# EAGLE board Universal_Board_Side_Mount (EAGLE 9.6.2)
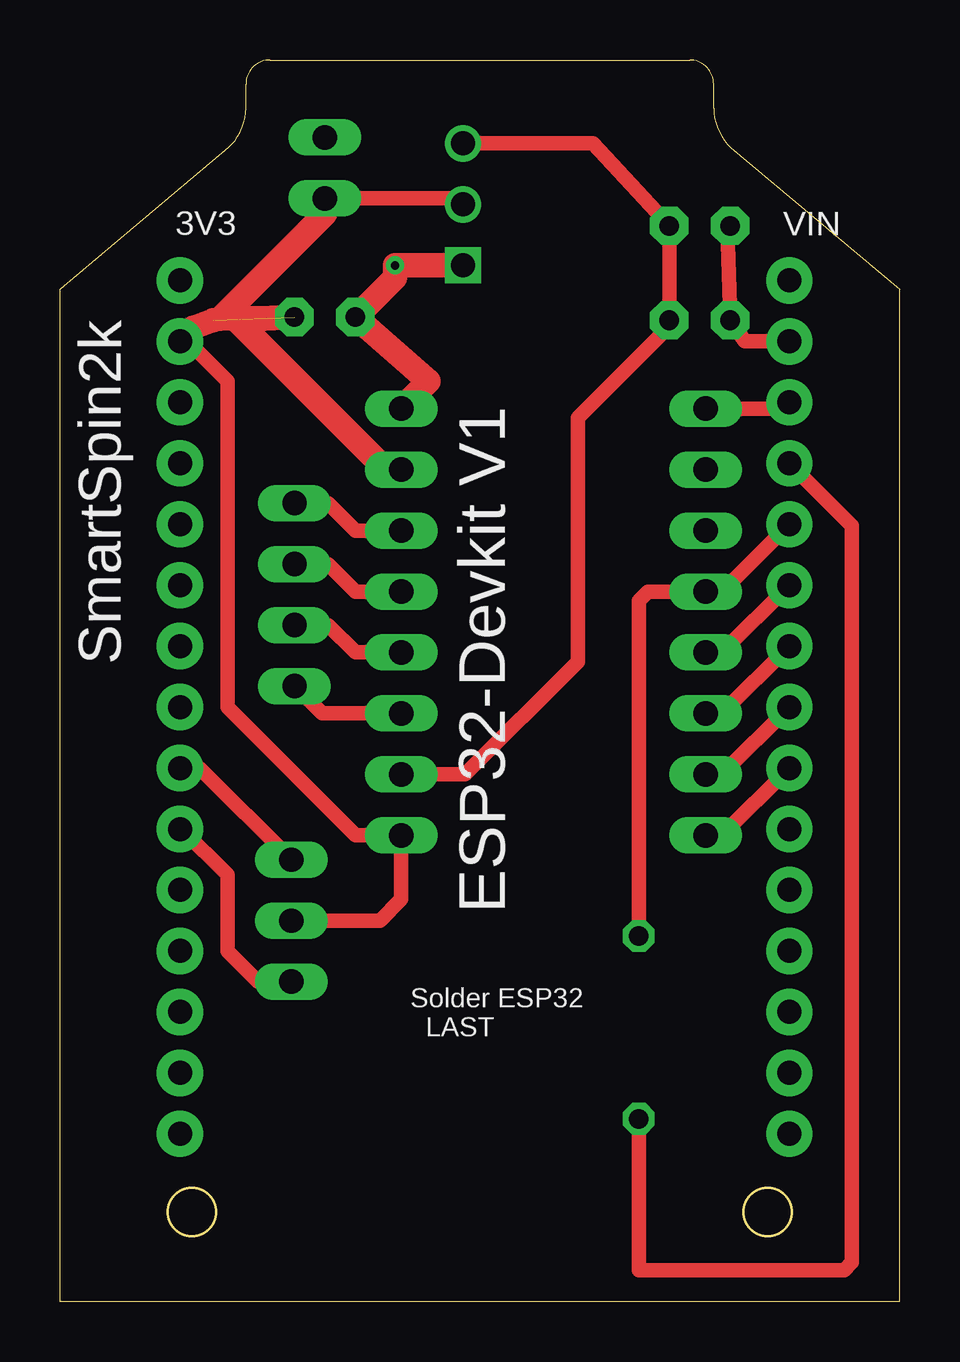
[diagram p0: board, top side]
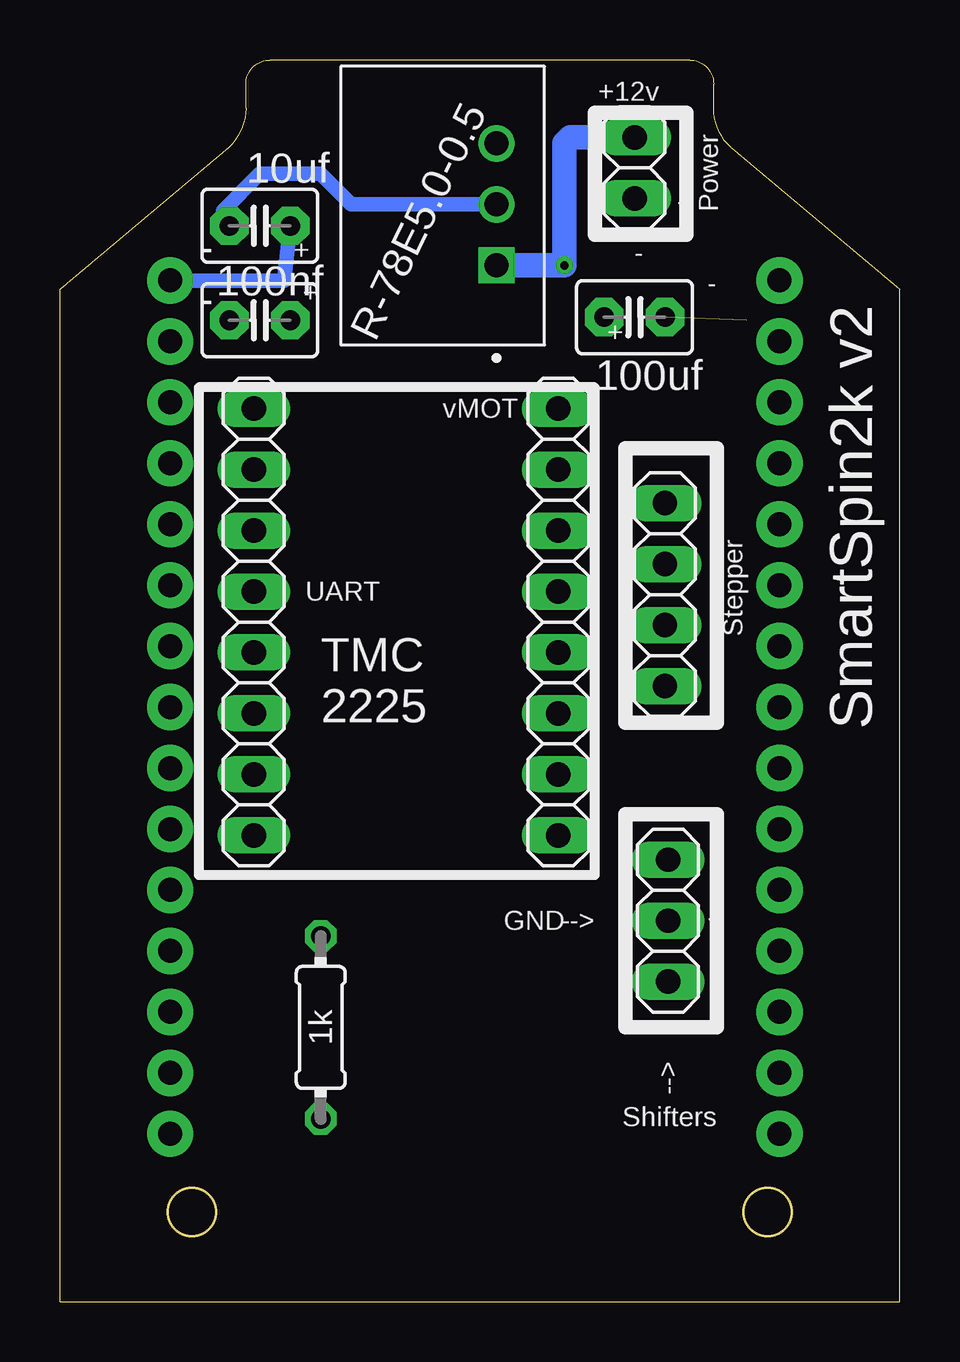
[diagram p1: board, bottom side, seen from below]

Size 35 x 51.74 mm. Coordinates in mm from the lower left corner, seen from the top.
Outline: 27.25,49.74 27.25,50.74 arc90 26.25,51.74 8.75,51.74 arc90 7.75,50.74 7.75,49.74 arc-48 7.02,48.08 0,42.19 0,0 35,0 35,42.19 27.98,48.08 arc-47 27.25,49.74
Outline: circle at 5.5,3.74 radius 1
Outline: circle at 29.5,3.74 radius 1
Copper layers (1*16): Top 0.035mm / dielectric 1.5mm / Bottom 0.035mm
Design rules "default *": minimum track width 24mil, minimum drill 0.35mm, track to track 10mil, track to pad 10mil, pad to pad 6mil, via to via 6mil, smd to smd 6mil, copper to edge 40mil, drill to drill 6mil, minimum pad ring 10mil, minimum via ring 8mil, stop-mask expansion 4mil, vias tented up to drill 0mil, thermal gap 10mil

## Footprints (pad centres in the part's own frame; a part is rotated, then mirrored left to right if it is on the bottom)
C2.5-3 = drill 0.813 pad 1.6 octagon: 1 -1.27,0; 2 1.27,0
1X02 = drill 1.016 long: 1 -1.27,0; 2 1.27,0
1X03 = drill 1.016 long: 1 -2.54,0; 2 0,0; 3 2.54,0
CONV_R-78E5.0-0.5 = drill 1 square: 1 -2.54,-2.25 | drill 1: 2 0,-2.25; 3 2.54,-2.25
0204/7 = drill 0.813 octagon: 1 -3.81,0; 2 3.81,0
1X04 = drill 1.016 long: 1 -3.81,0; 2 -1.27,0; 3 1.27,0; 4 3.81,0
1X08 = drill 1.016 long: 1 -8.89,0; 2 -6.35,0; 3 -3.81,0; 4 -1.27,0; 5 1.27,0; 6 3.81,0; 7 6.35,0; 8 8.89,0
ESP32-DEVKITV1 = drill 1 pad 1.93: 3V3 -16.52,-12.27; D1 13.96,-12.27; D2 -8.9,-12.27; D3 11.42,-12.27; D4 -6.36,-12.27; D5 1.26,-12.27; D12 -8.9,13.135; D13 -11.44,13.135; D14 -6.36,13.135; D15 -11.44,-12.27; D16 -3.82,-12.27; D17 -1.28,-12.27; D18 3.8,-12.27; D19 6.34,-12.27; D21 8.88,-12.27; D22 16.5,-12.27; D23 19.04,-12.27; D25 1.26,13.135; D26 -1.28,13.135; D27 -3.82,13.135; D32 6.34,13.135; D33 3.8,13.135; D34 11.42,13.135; D35 8.88,13.135; D36 16.5,13.135; D39 13.96,13.135; EN 19.04,13.135; GND@1 -13.98,13.135; GND@2 -13.98,-12.27; VIN -16.52,13.135

## Placement (x,y rotation side)
C3  100nf  [C2.5-3]  26.67,40.89 180 bottom
C4  10uf  [C2.5-3]  26.67,44.83 180 bottom
C5  100uf  [C2.5-3]  11.05,41.02 0 bottom
JP5  [1X02]  11.05,47.24 270 bottom
JP6  [1X03]  9.65,15.88 270 bottom
PS1  R-78E5.0-0.5  [CONV_R-78E5.0-0.5]  19.05,45.72 90 bottom
R1  1k  [0204/7]  24.13,11.43 90 bottom
STEPPER  [1X04]  9.78,29.46 270 bottom
TMC2225(1)  [1X08]  26.92,28.32 270 bottom
TMC2225(2)  [1X08]  14.22,28.32 90 bottom
U$1  ESP32DEVKITV1  [ESP32-DEVKITV1]  17.27,26.04 270 top

## Library data of the parts
C3-C5 = capacitor-wima
JP5 JP6 STEPPER TMC2225(1) TMC2225(2) = pinhead
PS1 = R-78E5.0-0.5; DESCRIPTION: Switching regulator module - DC/DC converter . Single Output. 7.0V to 28.0V input voltage range and 5 V output voltage range; DIGI-KEY_PART_NUMBER: 945-1648-5-ND; MF: Recom Power; MP: R-78E5.0-0.5; PACKAGE: SIP-3 Recom Power; PURCHASE-URL: https://pricing.snapeda.com/search/part/R-78E5.0-0.5/?ref=eda
R1 = rcl; SPICEPREFIX: R
U$1 = ESP32-DEVKITV1

## Nets
+5V: C3.1 C4.1 PS1.3 TMC2225(2).2 U$1.VIN
+12V: C5.1 JP5.1 PS1.1 TMC2225(2).8
GND: C3.2 C4.2 C5.2 JP5.2 JP6.2 PS1.2 TMC2225(2).1 TMC2225(2).7 U$1.GND@1 U$1.GND@2
N$1: R1.2 TMC2225(1).4 U$1.D14
N$2: TMC2225(1).1 U$1.D13
N$3: R1.1 U$1.D12
N$4: TMC2225(1).5 U$1.D27
N$5: TMC2225(1).6 U$1.D26
N$6: TMC2225(1).7 U$1.D25
N$7: TMC2225(1).8 U$1.D33
N$8: STEPPER.1 TMC2225(2).6
N$9: STEPPER.2 TMC2225(2).5
N$10: STEPPER.3 TMC2225(2).4
N$11: STEPPER.4 TMC2225(2).3
N$13: JP6.3 U$1.D19
N$15: JP6.1 U$1.D18

## Tracks (layer width: path | path; a pad name or v marks a point on that pad's centre or on a via)
+5V
  Top 0.61: PS1.3 22.23,48.26 C4.1 C3.1 25.27,40.51 21.59,36.83 21.59,26.67 16.89,21.97 TMC2225(2).2
  Bottom 0.61: C4.1 25.65,42.55 30.4,42.55 U$1.VIN
+12V  (via drill 0.35)
  Top 1.016: TMC2225(2).8 15.37,38.35 C5.1 13.97,42.67 v13.97,43.18 PS1.1
  Bottom 1.016: JP5.1 13.72,48.51 13.97,48.26 v13.97,43.18 PS1.1
GND  (1 unrouted)
  Top 0.61: JP6.2 13.34,15.88 14.22,16.76 TMC2225(2).1 12.32,19.43 6.99,24.77 6.99,38.35 5.32,40.02 U$1.GND@2 5.56,40.57 | U$1.GND@1 28.55,40.02 C3.2 27.81,44.7 C4.2 | JP5.2 16.55,45.97 PS1.2
  Top 1.016: TMC2225(2).7 13.59,34.67 7.37,40.89 C5.2 6.67,40.96 11.05,45.34 JP5.2 | 6.38,40.89 5.56,40.57
  Bottom 0.61: C4.2 28.19,45.47 26.67,46.99 24.13,46.99 22.86,45.72 PS1.2
N$1
  Top 0.61: U$1.D14 27.6,29.59 TMC2225(1).4 24.51,29.59 24.13,29.21 R1.2
N$2
  Top 0.61: U$1.D13 30.14,37.21 TMC2225(1).1
N$3
  Top 0.61: U$1.D12 33.02,32.32 33.02,1.65 32.69,1.32 24.13,1.32 R1.1
N$4
  Top 0.61: TMC2225(1).5 27.6,27.05 U$1.D27
N$5
  Top 0.61: TMC2225(1).6 27.6,24.51 U$1.D26
N$6
  Top 0.61: TMC2225(1).7 27.6,21.97 U$1.D25
N$7
  Top 0.61: TMC2225(1).8 27.6,19.43 U$1.D33
N$8
  Top 0.61: TMC2225(2).6 12.32,32.13 11.18,33.27 STEPPER.1
N$9
  Top 0.61: TMC2225(2).5 12.32,29.59 11.18,30.73 STEPPER.2
N$10
  Top 0.61: TMC2225(2).4 12.32,27.05 11.18,28.19 STEPPER.3
N$11
  Top 0.61: TMC2225(2).3 10.92,24.51 STEPPER.4
N$13
  Top 0.61: JP6.3 8.26,13.34 6.99,14.61 6.99,17.78 5.07,19.7 U$1.D19
N$15
  Top 0.61: JP6.1 5.83,22.23 U$1.D18

## Text on the board
tNames: SmartSpin2k | Solder ESP32 / LAST
bNames: +12v | Power | - | - | + | - | SmartSpin2k v2 | - | + | - | + | vMOT | Stepper | UART | TMC / 2225 | - | --> | GND | --> | Shifters